# EAGLE board JCarlos e Renato (EAGLE 6.2)
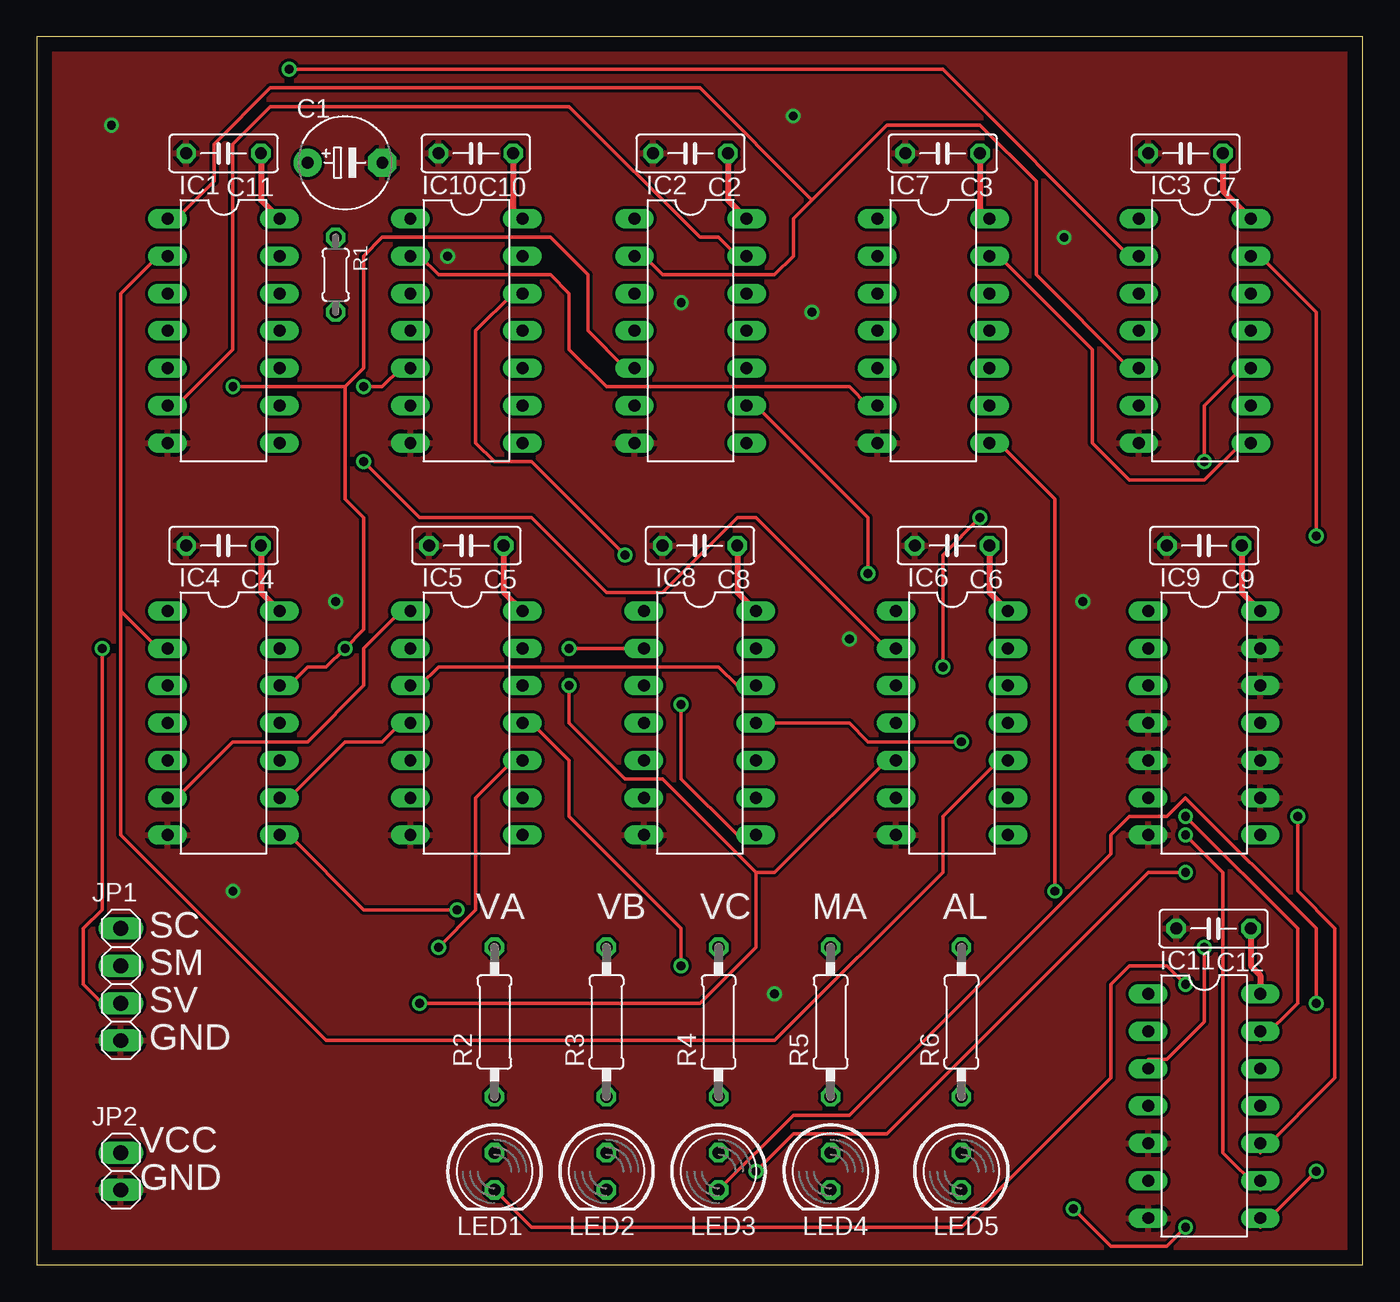
[diagram p0: board, top side]
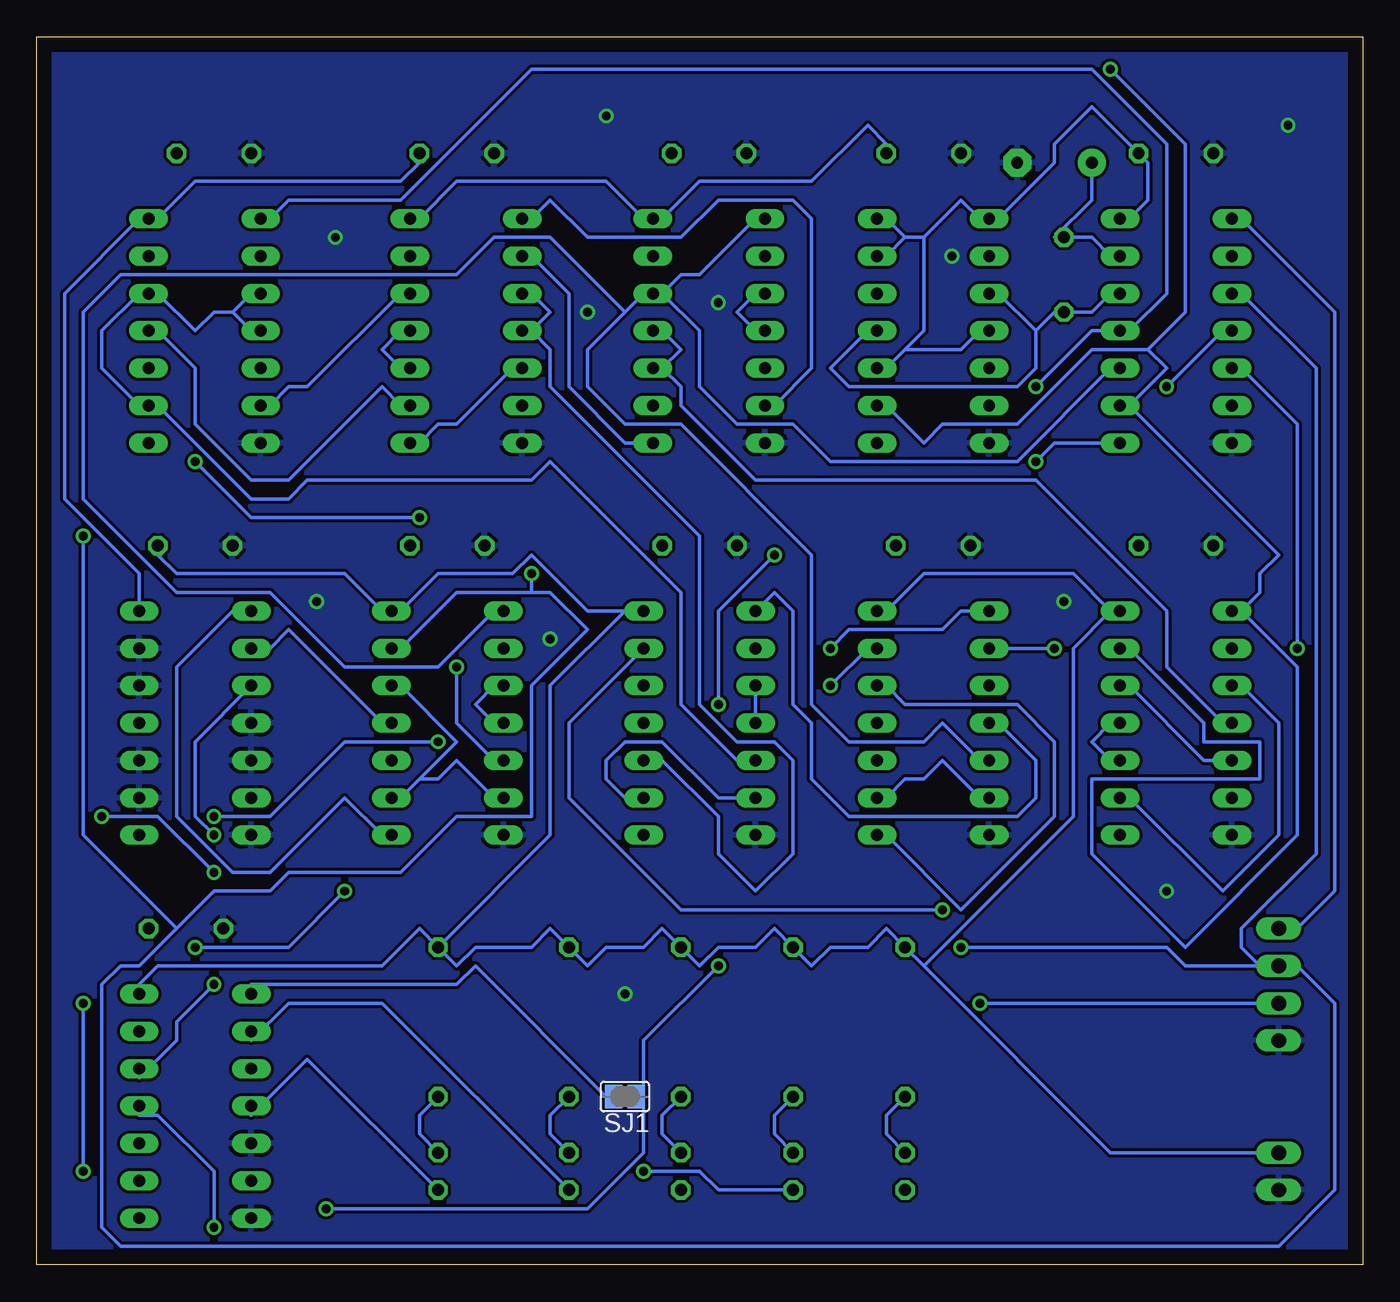
[diagram p1: board, bottom side, seen from below]

Size 90.15 x 83.49 mm. Coordinates in mm from the lower left corner, seen from the top.
Outline: 0,0 90.15,0 90.15,83.49 0,83.49 0,0
Copper layers (1*16): Top 0.035mm / dielectric 1.5mm / Bottom 0.035mm
Design rules: minimum track width 10mil, minimum drill 24mil, track to track 8mil, track to pad 8mil, pad to pad 8mil, via to via 8mil, smd to smd 8mil, copper to edge 40mil, drill to drill 8mil, minimum pad ring 10mil, minimum via ring 8mil, stop-mask expansion 4mil, vias tented up to drill 0mil, thermal gap 10mil

## Footprints (pad centres in the part's own frame; a part is rotated, then mirrored left to right if it is on the bottom)
E5-6 = drill 0.813 pad 1.905: + -2.54,0 | drill 0.813 pad 1.905 octagon: - 2.54,0
C050-025X075 = drill 0.813 octagon: 1 -2.54,0; 2 2.54,0
DIL14 = drill 0.813 long: 1 -7.62,-3.81; 2 -5.08,-3.81; 3 -2.54,-3.81; 4 0,-3.81; 5 2.54,-3.81; 6 5.08,-3.81; 7 7.62,-3.81; 8 7.62,3.81; 9 5.08,3.81; 10 2.54,3.81; 11 0,3.81; 12 -2.54,3.81; 13 -5.08,3.81; 14 -7.62,3.81
1X04 = drill 1.016 long: 1 -3.81,0; 2 -1.27,0; 3 1.27,0; 4 3.81,0
1X02 = drill 1.016 long: 1 -1.27,0; 2 1.27,0
LED5MM = drill 0.813 octagon: A -1.27,0; K 1.27,0
0204/5 = drill 0.813 octagon: 1 -2.54,0; 2 2.54,0
0207/10 = drill 0.813 octagon: 1 -5.08,0; 2 5.08,0
SJ = smd 1.168 x 1.6: 1 -0.762,0; 2 0.762,0

## Placement (x,y rotation side)
C1  1uF  [E5-6]  20.96,74.93 0 top
C2  0,1uF  [C050-025X075]  44.45,75.56 180 top
C3  0,1uF  [C050-025X075]  61.59,75.56 180 top
C4  0,1uF  [C050-025X075]  12.7,48.9 180 top
C5  0,1uF  [C050-025X075]  29.21,48.9 180 top
C6  0,1uF  [C050-025X075]  62.23,48.9 180 top
C7  0,1uF  [C050-025X075]  78.1,75.56 180 top
C8  0,1uF  [C050-025X075]  45.08,48.9 180 top
C9  0,1uF  [C050-025X075]  79.38,48.9 180 top
C10  0,1uF  [C050-025X075]  29.85,75.56 180 top
C11  0,1uF  [C050-025X075]  12.7,75.56 180 top
C12  0,1uF  [C050-025X075]  80.01,22.86 180 top
IC1  74HCT14N  [DIL14]  12.7,63.5 270 top
IC2  74HC08N  [DIL14]  44.45,63.5 270 top
IC3  74HC08N  [DIL14]  78.74,63.5 270 top
IC4  74HC08N  [DIL14]  12.7,36.83 270 top
IC5  74HC08N  [DIL14]  29.21,36.83 270 top
IC6  74HC08N  [DIL14]  62.23,36.83 270 top
IC7  7432N  [DIL14]  60.96,63.5 270 top
IC8  7432N  [DIL14]  45.08,36.83 270 top
IC9  7432N  [DIL14]  79.38,36.83 270 top
IC10  74S74N  [DIL14]  29.21,63.5 270 top
IC11  74HC14N  [DIL14]  79.38,10.79 270 top
JP1  [1X04]  5.71,19.05 270 top
JP2  [1X02]  5.71,6.35 270 top
LED1  [LED5MM]  31.11,6.35 270 top
LED2  [LED5MM]  38.73,6.35 270 top
LED3  [LED5MM]  46.36,6.35 270 top
LED4  [LED5MM]  53.97,6.35 270 top
LED5  [LED5MM]  62.86,6.35 270 top
R1  680R  [0204/5]  20.32,67.31 270 top
R2  330R  [0207/10]  31.11,16.51 90 top
R3  330R  [0207/10]  38.73,16.51 90 top
R4  330R  [0207/10]  46.36,16.51 90 top
R5  330R  [0207/10]  53.97,16.51 90 top
R6  330R  [0207/10]  62.86,16.51 90 top
SJ1  [SJ]  50.17,11.43 180 bottom

## Library data of the parts
C1 = rcl; E5-6: E5-6
C2-C12 R1-R6 = rcl
IC1-IC6 IC11 = 74xx-eu
IC7-IC10 = 74xx-us
JP1 JP2 = pinhead
LED1-LED5 = led
SJ1 = jumper

## Nets
!AL: IC11.4 LED5.K
!E0-: IC1.8 IC6.2
!E1-: IC1.10 IC2.1 IC2.12 IC5.5 IC6.1
!MA: IC11.2 LED4.K
!SC: IC1.2 IC4.2 IC6.10
!SM: IC1.4 IC2.5 IC4.5 IC4.12 IC5.2
!SV: IC1.6 IC2.13
!VA: IC11.12 LED1.K
!VB: IC11.10 LED2.K
!VC: IC11.8 LED3.K
+5V: C2.1 C3.1 C4.1 C5.1 C6.1 C7.1 C8.1 C9.1 C10.1 C11.1 C12.1 IC1.14 IC2.14 IC3.14 IC4.14 IC5.14 IC6.14 IC7.14 IC8.14 IC9.14 IC10.1 IC10.4 IC10.10 IC10.13 IC10.14 IC11.14 JP2.1 R2.2 R3.2 R4.2 R5.2 R6.2
A0: IC2.10 IC2.11 IC4.4
A1: IC3.3 IC3.4 IC3.9 IC3.12 IC8.5
AL: IC7.5 IC7.8 IC11.3
E0+: IC8.8 IC10.12
E0-: IC1.9 IC3.2 IC4.1 IC4.13 IC10.9
E1+: IC7.6 IC10.2
E1-: IC1.11 IC3.1 IC10.5
GND: C1.- C2.2 C3.2 C4.2 C5.2 C6.2 C7.2 C8.2 C9.2 C10.2 C11.2 C12.2 IC1.7 IC2.7 IC3.7 IC4.7 IC5.7 IC6.7 IC7.7 IC8.7 IC9.4 IC9.5 IC9.7 IC9.9 IC9.10 IC9.12 IC9.13 IC10.7 IC11.5 IC11.7 JP1.4 JP2.2
MA: IC11.1 SJ1.2
N$1: IC5.6 IC5.9
N$2: IC7.3 IC7.4 IC8.10
N$3: IC4.10 IC4.11
N$4: IC4.8 IC8.13
N$5: IC8.3 IC8.4
N$6: IC5.3 IC8.12
N$7: C1.+ IC1.13 R1.1
N$8: IC1.12 IC10.3 IC10.11 R1.2
N$9: IC8.6 IC8.9
N$10: IC4.3 IC4.9 IC5.4 IC8.1
N$11: IC5.8 IC5.12
N$12: IC4.6 IC5.1 IC8.2
N$13: IC2.3 IC2.4
N$14: LED1.A R2.1
N$15: IC2.6 IC7.1
N$16: LED2.A R3.1
N$17: LED3.A R4.1
N$18: IC2.8 IC7.2
N$19: IC3.6 IC7.12
N$20: IC3.8 IC7.13
N$21: IC3.11 IC7.9
N$22: IC7.10 IC7.11
N$23: LED4.A R5.1
N$24: LED5.A R6.1
N$27: IC6.3 IC6.4
N$29: IC6.6 IC6.9 IC6.12
N$32: IC6.8 IC9.1
N$33: IC6.11 IC9.2
SC: IC1.1 IC2.2 IC3.5 JP1.1
SM: IC1.3 IC2.9 IC3.13 IC5.10 IC6.13 JP1.2
SV: IC1.5 IC3.10 IC5.13 IC6.5 JP1.3
VA: IC8.11 IC11.13
VB: IC5.11 IC11.11 SJ1.1
VC: IC9.3 IC11.9

## Tracks (layer width: path | path; a pad name or v marks a point on that pad's centre or on a via)
!AL
  Bottom 0.254: LED5.K 71.75,13.97 75.56,10.16 IC11.4
!E0-  (via drill 0.61)
  Top 0.254: v22.23,54.61 26.04,50.8 33.66,50.8 38.73,45.72 42.55,45.72 47.62,50.8 48.89,50.8 57.78,41.91 IC6.2
  Bottom 0.254: IC1.8 20.96,55.88 v22.23,54.61
!E1-
  Bottom 0.254: 50.17,64.77 48.89,66.04 IC2.12 47.62,66.04 | 50.17,64.77 52.7,62.23 52.7,59.69 50.17,57.15 46.36,57.15 37.47,48.26 37.47,38.1 34.92,35.56 29.85,35.56 28.57,36.83 26.04,34.29 IC5.5 | 50.17,64.77 55.25,69.85 59.05,69.85 61.59,67.31 84.45,67.31 86.99,64.77 86.99,52.07 80.64,45.72 74.3,45.72 69.22,40.64 62.86,40.64 59.05,44.45 IC6.1 | 47.62,66.04 45.08,63.5 45.08,59.69 42.55,57.15 38.73,57.15 36.19,54.61 23.5,54.61 17.14,60.96 IC1.10 | 47.62,66.04 46.36,67.31 45.08,67.31 41.28,71.12 IC2.1
!MA
  Bottom 0.254: LED4.K 66.67,17.78 73.02,17.78 75.56,15.24 IC11.2
!SC
  Top 0.254: 5.71,44.45 8.26,41.91 IC4.2 | 5.71,44.45 5.71,66.04 8.26,68.58 IC1.2 | 5.71,44.45 5.71,29.21 19.68,15.24 50.17,15.24 61.59,26.67 61.59,30.48 65.41,34.29 IC6.10
!SM  (via drill 0.61)
  Top 0.254: IC4.12 17.14,39.37 18.41,40.64 19.68,40.64 v20.96,41.91 22.23,43.18 22.23,50.8 20.96,52.07 20.96,59.69 | 20.96,59.69 22.23,60.96 22.23,68.58 23.5,69.85 34.92,69.85 37.47,67.31 37.47,63.5 40,60.96 IC2.5 | 20.96,59.69 v13.34,59.69
  Bottom 0.254: IC4.5 10.8,34.29 15.88,39.37 IC4.12 | v20.96,41.91 IC5.2 | v13.34,59.69 9.53,63.5 IC1.4
!SV
  Top 0.254: IC1.6 9.53,58.42 13.34,62.23 13.34,76.2 15.88,78.74 36.19,78.74 45.08,69.85 46.36,69.85 47.62,68.58 IC2.13
!VA  (via drill 0.61)
  Top 0.254: LED1.K 33.66,2.54 62.86,2.54 73.02,12.7 73.02,19.05 74.3,20.32 76.83,20.32 v78.1,19.05
  Bottom 0.254: v78.1,19.05 80.64,16.51 80.64,15.24 83.19,12.7 IC11.12
!VB  (via drill 0.61)
  Top 0.254: v48.89,6.35 51.44,8.89 57.78,8.89 75.56,26.67 v78.1,26.67 | v85.72,30.48 85.72,25.4 88.27,22.86 88.27,12.7 83.19,7.62 IC11.10
  Bottom 0.254: LED2.K 43.81,5.08 45.08,6.35 v48.89,6.35 | v78.1,26.67 81.91,30.48 v85.72,30.48
!VC  (via drill 0.61)
  Top 0.254: LED3.K 51.44,10.16 55.25,10.16 73.02,27.94 73.02,29.21 74.3,30.48 76.83,30.48 78.1,31.75 86.99,22.86 v86.99,17.78 | v86.99,6.35 83.19,2.54 IC11.8
  Bottom 0.254: v86.99,6.35 v86.99,17.78
+5V
  Top 0.406: C12.1 82.55,20.32 83.19,19.68 83.19,19.05 83.82,18.41 IC11.14 | C9.1 81.91,45.72 IC9.14 | C6.1 64.77,45.72 IC6.14 | C8.1 47.62,45.72 IC8.14 | C5.1 31.75,45.72 IC5.14 | C4.1 15.24,45.72 IC4.14 | C11.1 15.24,72.39 IC1.14 | C10.1 32.39,71.75 IC10.14 | C2.1 46.99,72.39 IC2.14 | C3.1 64.13,71.75 IC7.14 | C7.1 80.64,73.03 IC3.14
  Bottom 0.254: 17.14,44.45 19.68,46.99 29.85,46.99 32.39,44.45 IC5.14 | JP2.1 17.14,7.62 29.85,20.32 | 29.85,20.32 R2.2 32.39,22.86 33.66,21.59 36.19,21.59 37.47,20.32 R3.2 40,22.86 41.28,21.59 43.81,21.59 45.08,20.32 R4.2 47.62,22.86 48.89,21.59 51.44,21.59 52.7,20.32 R5.2 55.25,22.86 56.52,21.59 60.33,21.59 61.59,20.32 R6.2 | 17.14,44.45 19.68,41.91 19.68,30.48 29.85,20.32 | 17.14,44.45 IC4.14 | 50.17,44.45 52.7,44.45 56.52,48.26 57.78,46.99 62.86,46.99 65.41,44.45 IC6.14 66.67,44.45 69.22,46.99 80.64,46.99 81.91,48.26 C9.1 | R6.2 64.13,22.86 66.67,20.32 81.91,20.32 83.19,19.05 IC11.14 | 50.17,44.45 55.25,39.37 55.25,29.21 R6.2 | 50.17,44.45 IC8.14 | 31.11,62.23 27.31,62.23 26.04,63.5 IC10.4 | 31.11,62.23 32.39,60.96 IC10.10 | 29.85,69.85 27.31,72.39 26.04,71.12 IC10.1 24.77,71.12 20.96,74.93 20.96,76.2 18.41,78.74 14.61,74.93 14.61,72.39 15.88,71.12 IC1.14 | 31.11,69.85 29.85,69.85 | 31.11,69.85 32.39,68.58 IC10.13 | 31.11,69.85 32.39,71.12 IC10.14 | 31.11,62.23 29.85,63.5 29.85,69.85 | IC7.14 64.13,71.12 61.59,73.66 51.44,73.66 48.89,71.12 IC2.14 47.62,71.12 45.08,73.66 37.47,73.66 33.66,77.47 32.39,76.2 C10.1 | C3.1 64.13,74.93 65.41,73.66 79.38,73.66 81.91,71.12 IC3.14 83.19,71.12 88.27,66.04 88.27,52.07 83.19,46.99 IC9.14
A0
  Bottom 0.254: 47.62,60.96 46.36,59.69 46.36,58.42 41.28,53.34 22.23,53.34 13.34,44.45 13.34,40.64 9.53,36.83 IC4.4 | 47.62,60.96 46.36,62.23 47.62,63.5 IC2.11 | 47.62,60.96 IC2.10
A1
  Bottom 0.254: 76.83,64.77 75.56,63.5 IC3.4 | 76.83,64.77 75.56,66.04 IC3.3 | 76.83,64.77 78.1,64.77 79.38,63.5 81.91,66.04 IC3.12 83.19,66.04 85.72,63.5 85.72,60.96 83.19,58.42 IC3.9 81.91,58.42 75.56,52.07 73.02,52.07 71.75,53.34 56.52,53.34 55.25,54.61 46.36,45.72 46.36,38.1 42.55,34.29 IC8.5
AL  (via drill 0.61)
  Top 0.254: v79.38,21.59 79.38,16.51 76.83,13.97 75.56,13.97 IC11.3 | v69.22,25.4 69.22,52.07 65.41,55.88 IC7.8
  Bottom 0.254: IC7.5 57.78,60.96 61.59,57.15 62.86,57.15 64.13,55.88 IC7.8 | v79.38,21.59 73.02,21.59 v69.22,25.4
E0+  (via drill 0.61)
  Top 0.254: IC8.8 47.62,29.21 43.81,33.02 v43.81,38.1 | v40,48.26 33.66,54.61 31.11,54.61 29.85,55.88 29.85,63.5 32.39,66.04 IC10.12
  Bottom 0.254: v43.81,38.1 43.81,44.45 v40,48.26
E0-  (via drill 0.61)
  Top 0.254: v17.14,81.28 61.59,81.28 74.3,68.58 IC3.2
  Bottom 0.254: 8.26,44.45 4.45,40.64 4.45,29.21 12.07,21.59 18.41,27.94 18.41,33.02 6.98,33.02 6.98,35.56 10.8,35.56 10.8,36.83 15.88,41.91 IC4.13 | 15.88,58.42 5.71,48.26 6.98,46.99 6.98,45.72 8.26,44.45 | 8.26,44.45 IC4.1 | 14.61,62.23 18.41,62.23 23.5,57.15 28.57,57.15 29.85,55.88 32.39,58.42 IC10.9 | 14.61,62.23 13.34,60.96 15.88,58.42 | 15.88,58.42 IC1.9 | v17.14,81.28 12.07,76.2 12.07,64.77 14.61,62.23
E1+
  Top 0.254: IC10.2 26.04,68.58 27.31,67.31 34.92,67.31 36.19,66.04 36.19,62.23 38.73,59.69 55.25,59.69 56.52,58.42 IC7.6
E1-  (via drill 0.61)
  Top 0.254: v22.23,59.69 23.5,59.69 24.77,60.96 IC10.5
  Bottom 0.254: IC3.1 74.3,71.12 73.02,72.39 65.41,72.39 56.52,81.28 18.41,81.28 13.34,76.2 13.34,66.04 15.88,63.5 IC1.11 18.41,63.5 v22.23,59.69
GND  (via drill 0.6)
  other vias: 51.44,78.11 5.08,77.47 69.85,69.85 43.81,65.41 52.7,64.77 20.32,45.09 13.34,25.4 71.12,45.09 55.25,42.55 50.17,18.41 27.94,68.58
  pour Bottom: -0.63,83.82 90.8,83.82 90.8,0 -0.63,0
  pour Top: -0.63,83.82 90.8,83.82 90.8,0 -0.63,0
MA
  Bottom 0.254: SJ1.2 51.44,11.43 60.33,20.32 61.59,19.05 75.56,19.05 IC11.1
N$1
  Bottom 0.254: IC5.6 26.04,31.75 28.57,34.29 29.85,33.02 31.11,33.02 32.39,31.75 IC5.9
N$2
  Bottom 0.254: IC8.10 47.62,34.29 43.81,30.48 43.81,27.94 41.28,25.4 38.73,27.94 38.73,34.29 40,35.56 42.55,35.56 45.08,38.1 45.08,49.53 55.25,59.69 55.25,62.23 56.52,63.5 | 56.52,63.5 55.25,64.77 56.52,66.04 IC7.3 | 56.52,63.5 IC7.4
N$3
  Bottom 0.254: IC4.10 17.14,34.29 18.41,35.56 17.14,36.83 IC4.11
N$4  (via drill 0.61)
  Top 0.254: v28.57,24.13 22.23,24.13 17.14,29.21 IC4.8
  Bottom 0.254: v28.57,24.13 46.36,24.13 53.97,31.75 53.97,36.83 IC8.13
N$5
  Bottom 0.254: IC8.3 IC8.4
N$6
  Top 0.254: IC8.12 47.62,39.37 46.36,40.64 27.31,40.64 26.04,39.37 IC5.3
N$7
  Bottom 0.254: IC1.13 17.14,68.58 18.41,69.85 R1.1 20.96,69.85 18.41,72.39 C1.+
N$8
  Bottom 0.254: IC1.12 17.14,66.04 18.41,64.77 R1.2 20.96,64.77 22.23,63.5 | 22.23,63.5 24.77,66.04 IC10.3 | 22.23,63.5 22.23,60.96 23.5,59.69 34.92,59.69 36.19,60.96 33.66,63.5 IC10.11
N$9
  Bottom 0.254: IC8.6 43.81,31.75 47.62,35.56 50.17,35.56 51.44,34.29 51.44,33.02 50.17,31.75 IC8.9
N$10
  Top 0.254: IC4.9 17.14,31.75 20.96,35.56 23.5,35.56 24.77,36.83 IC5.4
  Bottom 0.254: IC8.1 40,45.72 38.73,44.45 38.73,38.1 37.47,36.83 37.47,33.02 34.92,30.48 23.5,30.48 22.23,31.75 22.23,34.29 24.77,36.83 IC5.4 | IC4.9 15.88,31.75 9.53,25.4 5.71,29.21 5.71,36.83 8.26,39.37 IC4.3
N$11
  Bottom 0.254: IC5.8 32.39,29.21 27.31,24.13 20.96,30.48 20.96,35.56 23.5,38.1 31.11,38.1 32.39,39.37 IC5.12
N$12  (via drill 0.61)
  Top 0.254: IC4.6 9.53,31.75 13.34,35.56 18.41,35.56 22.23,39.37 22.23,41.91 24.77,44.45 IC5.1 | v36.19,41.91 IC8.2
  Bottom 0.254: v36.19,41.91 34.92,43.18 28.57,43.18 27.31,44.45 IC5.1
N$13
  Bottom 0.254: IC2.4 41.28,63.5 42.55,64.77 41.28,66.04 IC2.3
N$14
  Bottom 0.254: LED1.A 32.39,8.89 32.39,10.16 R2.1
N$15
  Bottom 0.254: IC2.6 40,58.42 37.47,60.96 37.47,71.12 38.73,72.39 43.81,72.39 46.36,69.85 52.7,69.85 55.25,72.39 56.52,71.12 IC7.1
N$16
  Bottom 0.254: LED2.A 40,8.89 40,10.16 R3.1
N$17
  Bottom 0.254: LED3.A 47.62,8.89 47.62,10.16 R4.1
N$18
  Bottom 0.254: IC2.8 50.17,55.88 53.97,59.69 53.97,66.04 56.52,68.58 IC7.2
N$19
  Bottom 0.254: IC7.12 65.41,66.04 71.75,59.69 73.02,59.69 74.3,58.42 IC3.6
N$20
  Top 0.254: IC7.13 65.41,68.58 71.75,62.23 71.75,55.88 74.3,53.34 79.38,53.34 81.91,55.88 IC3.8
N$21
  Bottom 0.254: IC7.9 65.41,58.42 66.67,59.69 73.02,53.34 75.56,53.34 79.38,57.15 79.38,60.96 81.91,63.5 IC3.11
N$22
  Bottom 0.254: IC7.10 65.41,60.96 66.67,62.23 65.41,63.5 IC7.11
N$23
  Bottom 0.254: LED4.A 55.25,8.89 55.25,10.16 R5.1
N$24
  Bottom 0.254: LED5.A 64.13,8.89 64.13,10.16 R6.1
N$27
  Bottom 0.254: IC6.4 59.05,36.83 60.33,38.1 59.05,39.37 IC6.3
N$29
  Bottom 0.254: 64.13,33.02 62.86,33.02 61.59,34.29 59.05,31.75 IC6.6 | 64.13,33.02 65.41,31.75 IC6.9 | 64.13,33.02 61.59,35.56 65.41,39.37 IC6.12
N$32
  Bottom 0.254: IC9.1 76.83,44.45 80.64,40.64 80.64,30.48 76.83,26.67 74.3,26.67 69.22,31.75 66.67,29.21 IC6.8
N$33
  Bottom 0.254: IC9.2 74.3,41.91 73.02,43.18 66.67,36.83 IC6.11
SC
  Top 0.254: 52.7,72.39 51.44,71.12 51.44,68.58 50.17,67.31 42.55,67.31 41.28,68.58 IC2.2 | 52.7,72.39 57.78,77.47 64.13,77.47 67.94,73.66 67.94,67.31 74.3,60.96 IC3.5 | 52.7,72.39 45.08,80.01 15.88,80.01 12.07,76.2 12.07,73.66 9.53,71.12 IC1.1
  Bottom 0.254: JP1.1 4.45,22.86 1.91,25.4 1.91,64.77 8.26,71.12 IC1.1
SM  (via drill 0.61)
  Top 0.254: v27.31,21.59 29.85,24.13 29.85,31.75 32.39,34.29 IC5.10 | v56.52,46.99 56.52,50.8 48.89,58.42 IC2.9 | v86.99,49.53 86.99,64.77 83.19,68.58 IC3.13
  Bottom 0.254: 56.52,45.72 55.25,45.72 52.7,43.18 56.52,39.37 56.52,30.48 61.59,30.48 65.41,26.67 73.02,26.67 74.3,25.4 78.1,25.4 80.64,22.86 | 56.52,45.72 61.59,45.72 65.41,41.91 IC6.13 | 80.64,22.86 83.19,20.32 84.45,20.32 85.72,19.05 85.72,2.54 84.45,1.27 5.71,1.27 1.91,5.08 1.91,17.78 4.45,20.32 JP1.2 6.98,20.32 | 6.98,20.32 8.26,21.59 8.26,22.86 3.18,27.94 3.18,60.96 8.26,66.04 IC1.3 | v27.31,21.59 13.34,21.59 12.07,20.32 6.98,20.32 | 56.52,45.72 v56.52,46.99 | v86.99,49.53 86.99,29.21 80.64,22.86
SV  (via drill 0.61)
  Top 0.254: v4.45,41.91 4.45,24.13 3.18,22.86 3.18,19.05 4.45,17.78 JP1.3 | v36.19,39.37 36.19,36.83 40,33.02 42.55,33.02 48.89,26.67 | 48.89,26.67 50.17,26.67 57.78,34.29 IC6.5 | v79.38,54.61 79.38,58.42 81.91,60.96 IC3.10 | v64.13,50.8 61.59,48.26 v61.59,40.64 | v26.04,17.78 45.08,17.78 48.89,21.59 48.89,26.67
  Bottom 0.254: v4.45,41.91 4.45,57.15 8.26,60.96 IC1.5 | v36.19,39.37 33.66,41.91 IC5.13 | v79.38,54.61 75.56,50.8 v64.13,50.8 | v61.59,40.64 61.59,36.83 59.05,34.29 IC6.5 | v26.04,17.78 JP1.3
VA  (via drill 0.61)
  Top 0.254: IC8.11 55.25,36.83 56.52,35.56 v62.86,35.56 | v78.1,30.48 85.72,22.86 85.72,17.78 83.19,15.24 IC11.13
  Bottom 0.254: v62.86,35.56 69.22,35.56 74.3,30.48 v78.1,30.48
VB  (via drill 0.61)
  Top 0.254: v43.81,20.32 43.81,22.86 36.19,30.48 36.19,34.29 33.66,36.83 IC5.11 | v78.1,2.54 76.83,1.27 73.02,1.27 v70.48,3.81
  Bottom 0.254: 48.89,11.43 48.89,15.24 v43.81,20.32 | v78.1,2.54 78.1,6.35 81.91,10.16 83.19,10.16 IC11.11 | v70.48,3.81 52.7,3.81 48.89,7.62 48.89,11.43 | 48.89,11.43 SJ1.1
VC  (via drill 0.61)
  Top 0.254: v78.1,29.21 80.64,26.67 80.64,7.62 83.19,5.08 IC11.9
  Bottom 0.254: IC9.3 79.38,35.56 79.38,30.48 v78.1,29.21

## Text on the board
tNames: VA | VB | VC | MA | AL | SC | SM | SV | GND | VCC | GND